# Altium PCB PCB1.PcbDoc (part 1 of 2)
Units mil, origin at the board's own origin, x right, y up, seen from the top; angles counter-clockwise.
Board outline 6000 x 4000 mil, 2 copper layers (Top Layer, Bottom Layer); 103 components, 58 nets, 299 pads, 28 vias.
Unrouted connection lines stored in the file: 129.
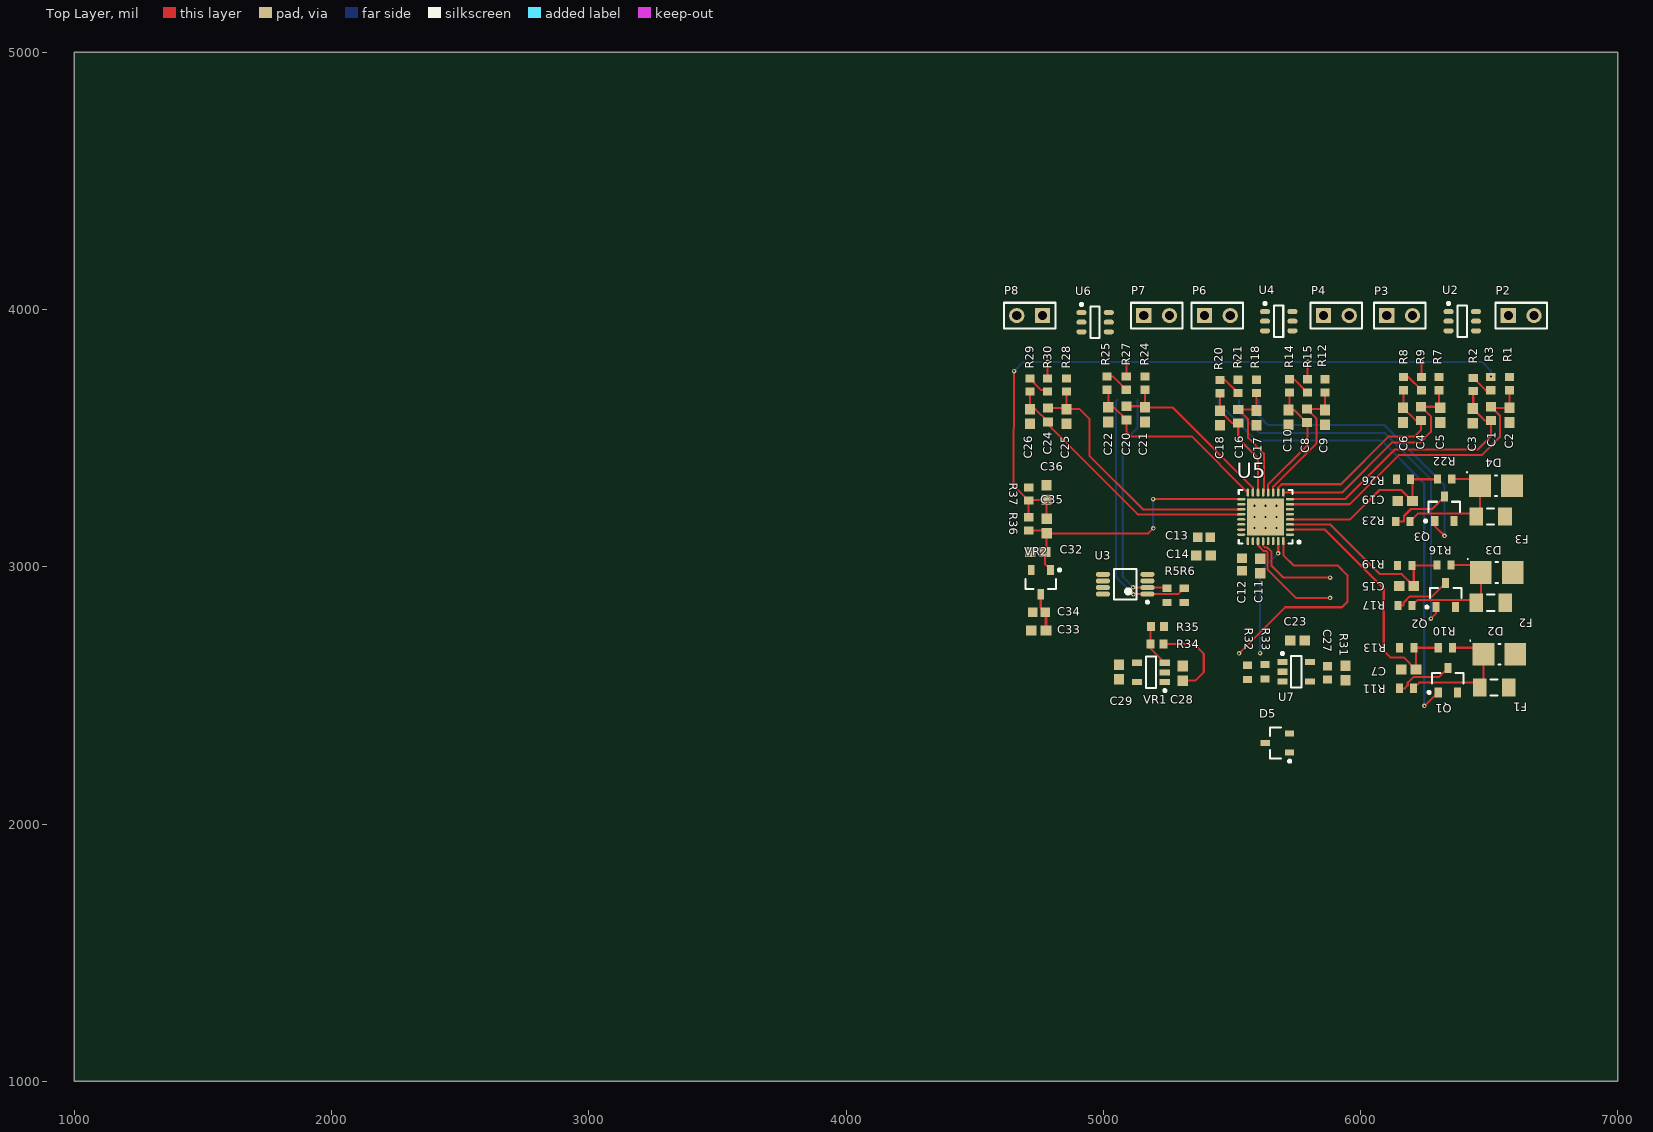
[diagram p0: Top Layer view]
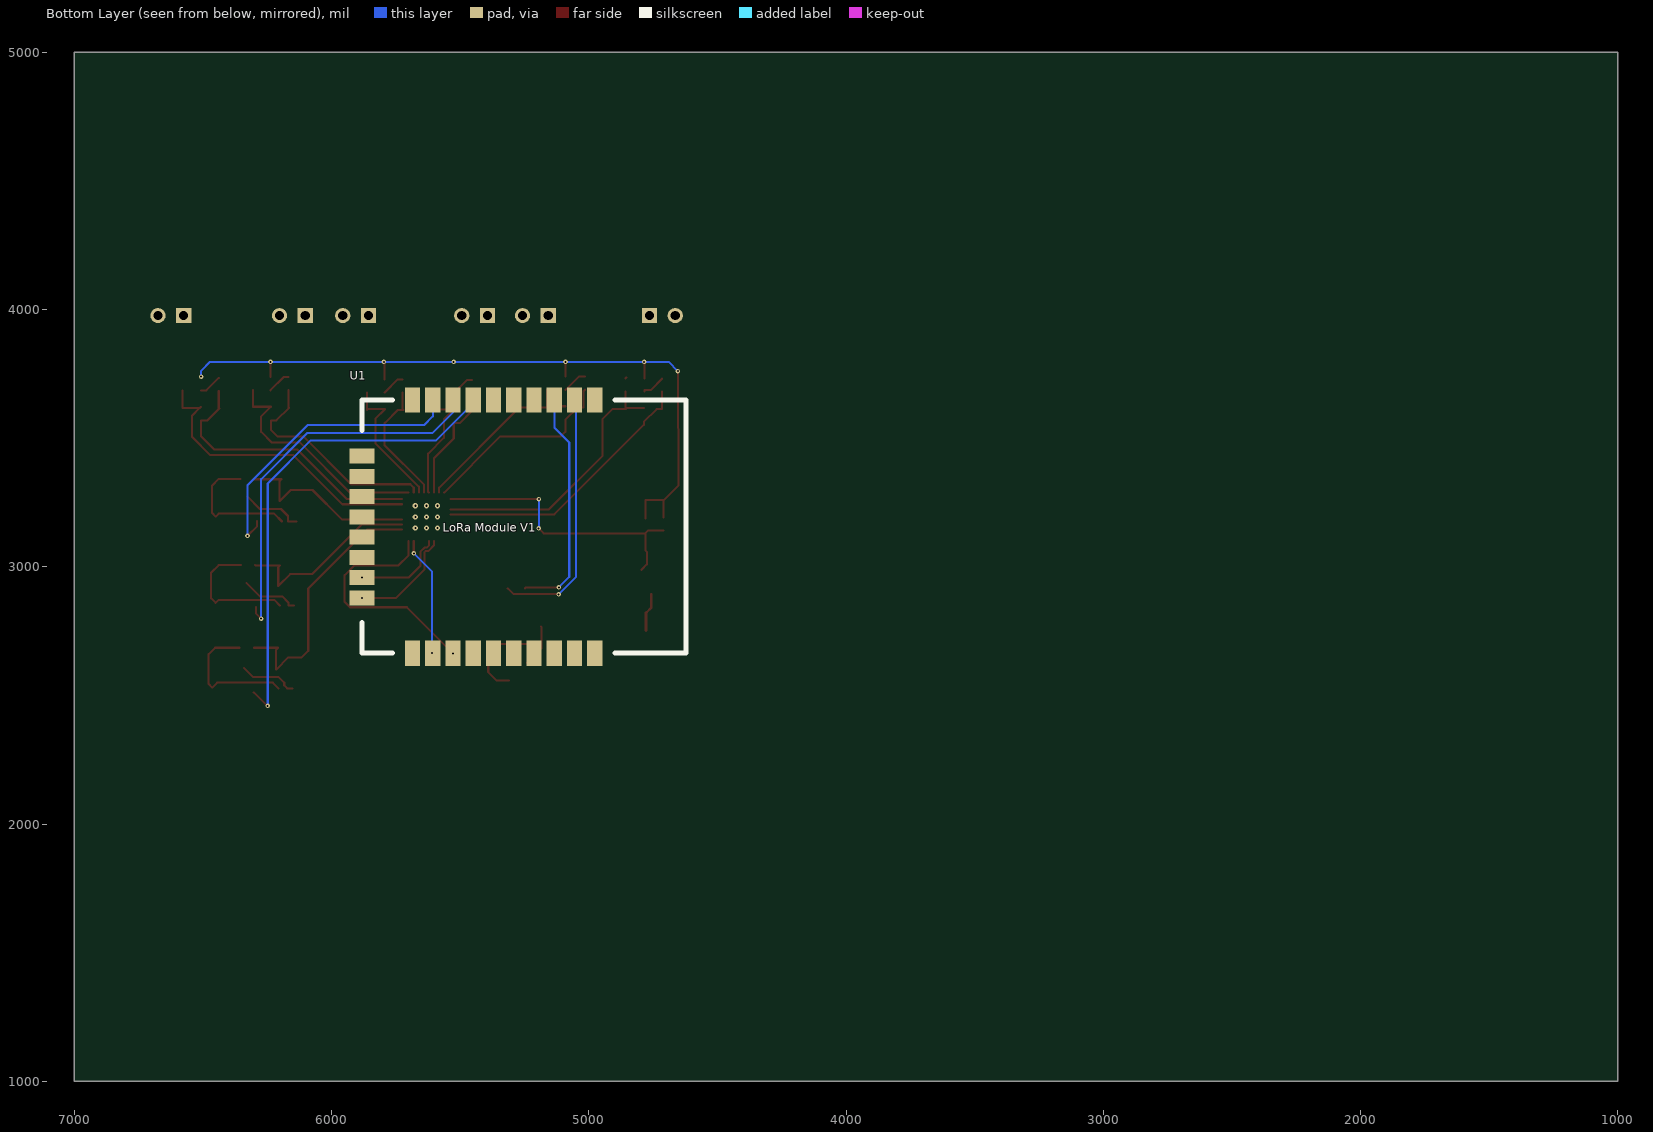
[diagram p1: Bottom Layer view, seen from below]

## Layer stack, top to bottom
Top Solder: solder mask 0.4, Solder Resist, Dk 3.5
Top Layer: signal copper 1.4
Dielectric 1: dielectric 12.6, FR-4, Dk 4.8
Bottom Layer: signal copper 1.4
Bottom Solder: solder mask 0.4, Solder Resist, Dk 3.5

## Board outline
1000,1000 7000,1000 7000,5000 1000,5000

## Design rules (kind name [scope] priority, off if disabled: settings)
Clearance [All] p1: gap=5 ignorepadtopadclearanceinfootprint=FALSE
HoleSize [All] p1: absolutevalues=TRUE maxlimit=248.03 minlimit=7.87 maxpercent=80.000 minpercent=20.000
MinimumSolderMaskSliver [All] p1: minsoldermaskwidth=7.87
PolygonConnect [All] p1: connectstyle=Relief reliefconductorwidth=10 reliefentries=4 polygonreliefangle="90 Angle" airgapwidth=10
RoomDefinition supply [InComponentClass('supply')] p1: confinementstyle=ConfineIn formatcopy=TRUE lockcomponents=FALSE outline 7045,4030 10955,4030 10955,4350 7045,4350
RoomDefinition Sheet1 [InComponentClass('Sheet1')] p2: confinementstyle=ConfineIn formatcopy=TRUE lockcomponents=FALSE outline 7045,2175 24230,2175 24230,3980 7045,3980
RoutingVias [All] p1: holewidth=7.87 width=50 viastyle="Through Hole" minholewidth=7.87 minwidth=23.62 maxholewidth=248.03 maxwidth=50
ShortCircuit [All] p1: allowed=TRUE
SolderMaskExpansion [All] p1: expansion=4
Width [All] p1: maxlimit=24 minlimit=3.5 preferedwidth=8
27 further rules are at their usual default settings.

## Classes and differential pairs
component class supply: C28 C29 C30 C31 C32 C33 C34 C35 C36 D5 L1 P9 R34 R35 R36 R37 VR1 VR2
component class Sheet1: C1 C2 C3 C4 C5 C6 C7 C8 C9 C10 C11 C12 C13 C14 C15 C16 C17 C18 C19 C20 C21 C22 C23 C24 C25 C26 C27 D1 D2 D3 D4 F1 F2 F3 P1 P2 P3 P4 P5 P6 P7 P8 Q1 Q2 Q3 R1 R2 R3 R4 R5 R6 R7 R8 R9 R10 R11 R12 R13 R14 R15 R16 R17 R18 R19 R20 R21 R22 R23 R24 R25 R26 R27 R28 R29 R30 R31 R32 R33 U1 U2 U3 U4 U5 U6 U7

## Components (designator, comment, footprint, x,y, rotation, side; value= is the part's Value field where it differs from the comment)
C1 "0.1uF" Chip2PinKEMETcap 6507.61,3595.3 r270 top
C2 "0.01 uF" Chip2PinWURTcap 6578.67,3589.4 r270 top
C3 "0.01 uF" Chip2PinWURTcap 6436.57,3586.64 r90 top
C4 "0.1uF" Chip2PinKEMETcap 6235.97,3595.47 r270 top
C5 "0.01 uF" Chip2PinWURTcap 6310.04,3589.57 r270 top
C6 "0.01 uF" Chip2PinWURTcap 6164.94,3589.57 r90 top
C7 "0.01uF 0603" Chip2PinWURTcap 6187.08,2600.2 r180 top
C8 "0.1uF" Chip2PinKEMETcap 5791.6,3586.89 r270 top
C9 "0.01 uF" Chip2PinWURTcap 5862.64,3580.98 r270 top
C10 "0.01 uF" Chip2PinWURTcap 5720.57,3580.98 r90 top
C11 "4.7uF" Chip2TAIYOcap 5539.44,3008.69 r90 top
C12 "0.01 uF" Chip2PinWURTcap 5610.47,3002.79 r270 top
C13 "4.7uF" Chip2TAIYOcap 5391.73,3114.57 r0 top
C14 "0.01 uF" Chip2PinWURTcap 5389.67,3043.53 r180 top
C15 "0.01uF 0603" Chip2PinWURTcap 6178.6,2925.2 r180 top
C16 "0.1uF" Chip2PinKEMETcap 5524.81,3585 r270 top
C17 "0.01 uF" Chip2PinWURTcap 5595.85,3579.09 r270 top
C18 "0.01 uF" Chip2PinWURTcap 5453.78,3578.03 r90 top
C19 "0.01uF 0603" Chip2PinWURTcap 6173.6,3255.2 r180 top
C20 "0.1uF" Chip2PinKEMETcap 5090.72,3597.35 r270 top
C21 "0.01 uF" Chip2PinWURTcap 5161.75,3591.45 r270 top
C22 "0.01 uF" Chip2PinWURTcap 5019.69,3591.45 r90 top
C23 "1uF" Chip2PinWURTcap 5754.92,2713.24 r0 top
C24 "0.1uF" Chip2PinKEMETcap 4785.67,3590 r270 top
C25 "0.01 uF" Chip2PinWURTcap 4856.7,3584.09 r270 top
C26 "0.01 uF" Chip2PinWURTcap 4714.64,3584.09 r90 top
C27 "NM" Chip2PinWURTcap 5941.63,2587.01 r270 top
C28 "1uF" Chip2PinWURTcap 5309.34,2585.71 r90 top
C29 "1uF" Chip2PinWURTcap 5060.97,2590.71 r90 top
C30 "0.01 uF" Chip2PinWURTcap 9365,4180 r90 top
C31 "0.01 uF" Chip2PinWURTcap 9595,4180 r90 top
C32 "1uF" Chip2PinWURTcap 4745.28,3057.81 r0 top
C33 "0.01 uF" Chip2PinWURTcap 4748.82,2752.19 r0 top
C34 "4.7uF" Chip2TAIYOcap 4750,2823.22 r0 top
C35 "1uF" Chip2PinWURTcap 4780.28,3158.37 r270 top
C36 "1uF" Chip2PinWURTcap 4779.34,3288.45 r270 top
D1 "Red LEDs" Wurth_LED_0603 20835,3840 r0 top
D2 "10v" Chip2Pin-SMB10JA 6539.8,2660.2 r180 top
D3 "10v" Chip2Pin-SMB10JA 6529.8,2977.57 r180 top
D4 "10v" Chip2Pin-SMB10JA 6526.81,3315.2 r180 top
D5 "5v" SOT23-BZX84B5V 5677.17,2314.96 r180 top
F1 "50mA 60V 1206" Chip2Pin-1206-FUSE-0ZCJ0005FF2E 6519.8,2530.2 r180 top
F2 "50mA 60V 1206" Chip2Pin-1206-FUSE-0ZCJ0005FF2E 6506.69,2860.2 r180 top
F3 "50mA 60V 1206" Chip2Pin-1206-FUSE-0ZCJ0005FF2E 6505.91,3195.2 r180 top
L1 "120 ohm, 100MHz" Chip22506031217Z0-FeBread 10510,4210 r0 top
P1 "" HDR1X2 24170,3720 r90 top
P2 "" HDR1X2 6574.8,3976.38 r0 top
P3 "" HDR1X2 6102.36,3976.38 r0 top
P4 "" HDR1X2 5856.27,3976.38 r0 top
P5 "" HDR1X9 17815,3020 r90 top
P6 "" HDR1X2 5393.7,3976.38 r0 top
P7 "" HDR1X2 5157.48,3976.38 r0 top
P8 "" HDR1X2 4763.78,3976.38 r180 top
P9 "" HDR1X2 10665,4090 r90 top
Q1 "FDV305N" SOT23-3PIN-ON-STANT 6339.8,2558.89 r90 top
Q2 "FDV305N" SOT23-3PIN-ON-STANT 6331.32,2890.2 r90 top
Q3 "FDV305N" SOT23-3PIN-ON-STANT 6326.32,3225.2 r90 top
R1 "1K" Chip2VISHAYres_0603 6578.74,3711.61 r90 top
R2 "1K" Chip2VISHAYres_0603 6438.54,3708.86 r90 top
R3 "10K" Chip2Pin-ROHM-res 6506.57,3711.61 r90 top
R4 "470 Ohms" ChipYAGEO_0603 23350,3845 r0 top
R5 "10K 0603 1%" ChipYAGEO_0603 5247.86,2888.95 r270 top
R6 "10K 0603 1%" ChipYAGEO_0603 5314.96,2888.78 r270 top
R7 "1K" Chip2VISHAYres_0603 6305.04,3711.78 r90 top
R8 "1K" Chip2VISHAYres_0603 6167.87,3711.78 r90 top
R9 "10K" Chip2Pin-ROHM-res 6237.94,3711.78 r90 top
R10 "7.5K" ChipYAGEO_0603 6329.8,2685.2 r0 top
R11 "523ohm 0603 1%" ChipYAGEO_0603 6179.13,2527.56 r0 top
R12 "1K" Chip2VISHAYres_0603 5862.64,3703.2 r90 top
R13 "2.49K" ChipYAGEO_0603 6179.8,2685.2 r0 top
R14 "1K" Chip2VISHAYres_0603 5723.5,3703.2 r90 top
R15 "10K" Chip2Pin-ROHM-res 5793.57,3703.2 r90 top
R16 "7.5K" ChipYAGEO_0603 6324.8,3006.51 r0 top
R17 "523ohm 0603 1%" ChipYAGEO_0603 6173.23,2849.41 r0 top
R18 "1K" Chip2VISHAYres_0603 5595.85,3701.31 r90 top
R19 "2.49K" ChipYAGEO_0603 6172.24,3005.2 r0 top
R20 "1K" Chip2VISHAYres_0603 5453.78,3700.25 r90 top
R21 "10K" Chip2Pin-ROHM-res 5523.78,3701.31 r90 top
R22 "7.5K" ChipYAGEO_0603 6327.24,3341.51 r0 top
R23 "523ohm 0603 1%" ChipYAGEO_0603 6164.8,3176.13 r0 top
R24 "1K" Chip2VISHAYres_0603 5161.75,3713.66 r90 top
R25 "1K" Chip2VISHAYres_0603 5014.69,3713.66 r90 top
R26 "2.49K" ChipYAGEO_0603 6167.36,3340.2 r0 top
R27 "10K" Chip2Pin-ROHM-res 5089.69,3713.66 r90 top
R28 "1K" Chip2VISHAYres_0603 4857.74,3706.31 r90 top
R29 "1K" Chip2VISHAYres_0603 4714.64,3706.31 r90 top
R30 "10K" Chip2Pin-ROHM-res 4783.7,3706.31 r90 top
R31 "0 ohm" Chip2VISHAYres_0603 5872.57,2587.6 r90 top
R32 "1M" ChipYAGEO_0603 5561.04,2589.57 r270 top
R33 "1M" ChipYAGEO_0603 5628.14,2592.01 r270 top
R34 "0 ohm" Chip2VISHAYres_0603 5208.66,2699.97 r0 top
R35 "0 ohm" Chip2VISHAYres_0603 5210.63,2767.07 r180 top
R36 "1K" Chip2VISHAYres_0603 4710.28,3166.91 r90 top
R37 "1K" Chip2VISHAYres_0603 4710.28,3282.5 r90 top
U1 "loRa node v1" LoRa_node 5881.89,2664.37 r270 bottom
U2 "IP4220CZ6F" TSOP6-IP4220CZ6F 6395.67,3954.72 r0 top
U3 "MCP9808T" SOP127P600-8N-MCP9808T 5085.3,2932.09 r180 top
U4 "IP4220CZ6F" TSOP6-IP4220CZ6F 5682.09,3954.72 r0 top
U5 "AD71994" QFN127P600-AD7194BCPZ 5631.18,3193.9 r180 top
U6 "IP4220CZ6F" TSOP6-IP4220CZ6F 4968.5,3950.79 r0 top
U7 "MCP6001T-I/OT" SOT23-MCP600 5750.35,2592.01 r0 top
VR1 "TLV755P" SOT23-TLV755P 5185.16,2589.57 r180 top
VR2 "AD1582BRTZ" SOT23-AD1582BRTZ 4757.68,2940.51 r270 top

## Footprints (in the part's own frame and the unit in brackets; to place one, negate y for a bottom-side part, rotate by r counter-clockwise, add the part's x,y. Pads: shape width x height; smd on the part's side, far side on the other; paste and mask are expansions set on the pad)
Chip2Pin-1206-FUSE-0ZCJ0005FF2E [mm]
  rect 1.35x1.8 smd: 1(-1.425,0) 2(1.425,0)
  silkscreen extent -0.35,-0.8 0.35,0.8, body extent -1.75,-0.9 1.75,0.9, height 0.85
Chip2Pin-ROHM-res [mm]
  rect 0.8x0.9 smd: 1(-0.65,0) 2(0.65,0)
  body extent -0.85,-0.45 0.85,0.45, height 0.55
Chip2Pin-SMB10JA [mm]
  rect 2.15x2.25 smd: 1(-1.575,0) 2(1.575,0)
  silkscreen extent -0.1,-1.39 2.91,1.02, body extent -2.28,-1.1 2.28,1.1, height 2.5
Chip2PinKEMETcap [mm]
  rect 0.9x1 smd: 1(-0.675,0) 2(0.675,0)
  body extent -0.87,-0.48 0.87,0.48, height 0.55
Chip2PinWURTcap [mm]
  rect 1.05x1 smd: 1(-0.725,0) 2(0.725,0)
  body extent -0.87,-0.48 0.87,0.48, height 0.55
Chip2TAIYOcap [mm]
  rect 0.95x0.95 smd: 1(-0.625,0) 2(0.625,0)
  body extent -0.85,-0.45 0.85,0.45, height 0.55
Chip2VISHAYres_0603 [mm]
  rect 0.8x0.9 smd: 1(-0.65,0) 2(0.65,0)
  body extent -0.85,-0.45 0.85,0.45, height 0.6
Chip22506031217Z0-FeBread [mm]
  rect 0.87x0.98 smd: 1(-0.665,0) 2(0.665,0)
  body extent -0.87,-0.48 0.87,0.48, height 0.95
ChipYAGEO_0603 [mm]
  rect 0.7x0.9 smd: 1(-0.7,0) 2(0.7,0)
  body extent -0.85,-0.45 0.85,0.45, height 0.55
HDR1X2 [mm] "Connector; Header; 2 Position"
  rect 1.5x1.5 hole 0.9: 1(0,0)
  round 1.5 hole 0.9: 2(2.54,0)
  silkscreen extent -1.27,-1.27 3.81,1.27
HDR1X9 [mm] "Connector; Header; 9 Position"
  rect 1.5x1.5 hole 0.9: 1(0,0)
  round 1.5 hole 0.9: 2(2.54,0) 3(5.08,0) 4(7.62,0) 5(10.16,0) 6(12.7,0) 7(15.24,0) 8(17.78,0) 9(20.32,0)
  silkscreen extent -1.27,-1.27 21.59,1.27
LoRa_node [mm]
  rect 2.5x1.5 smd: 1(-25,23) 2(-25,21) 3(-25,19) 4(-25,17) 5(-25,15) 6(-25,13) 7(-25,11) 8(-25,9) 9(-25,7) 10(-25,5) 19(0,5) 20(0,7) 21(0,9) 22(0,11) 23(0,13) 24(0,15) 25(0,17) 26(0,19) 27(0,21) 28(0,23)
  rect 1.5x2.5 smd: 11(-19.45,0) 12(-17.45,0) 13(-15.45,0) 14(-13.45,0) 15(-11.45,0) 16(-9.45,0) 17(-7.45,0) 18(-5.45,0)
  silkscreen extent -25,0 0,32, body extent -25,0 0,32, height 2.45
QFN127P600-AD7194BCPZ [mm]
  oval 0.8x0.25 smd: 1(-2.4,1.75) 2(-2.4,1.25) 3(-2.4,0.75) 4(-2.4,0.25) 5(-2.4,-0.25) 6(-2.4,-0.75) 7(-2.4,-1.25) 8(-2.4,-1.75) 17(2.4,-1.75) 18(2.4,-1.25) 19(2.4,-0.75) 20(2.4,-0.25) 21(2.4,0.25) 22(2.4,0.75) 23(2.4,1.25) 24(2.4,1.75)
  oval 0.25x0.8 smd: 9(-1.75,-2.4) 10(-1.25,-2.4) 11(-0.75,-2.4) 12(-0.25,-2.4) 13(0.25,-2.4) 14(0.75,-2.4) 15(1.25,-2.4) 16(1.75,-2.4) 25(1.75,2.4) 26(1.25,2.4) 27(0.75,2.4) 28(0.25,2.4) 29(-0.25,2.4) 30(-0.75,2.4) 31(-1.25,2.4) 32(-1.75,2.4)
  rect 3.65x3.65 smd: 33(0,0)
  silkscreen extent -3.43,-2.65 2.65,2.65, body extent -2.52,-2.52 2.52,2.52, height 0.8
SOP127P600-8N-MCP9808T [mm]
  oval 1.4x0.5 smd: 1(-2.2,0.975) 2(-2.2,0.325) 3(-2.2,-0.325) 4(-2.2,-0.975) 5(2.2,-0.975) 6(2.2,-0.325) 7(2.2,0.325) 8(2.2,0.975)
  silkscreen extent -2.33,-1.5 1.1,1.9, body extent -2.45,-1.5 2.45,1.5, height 1.1
SOT23-3PIN-ON-STANT [mm]
  rect 1x0.7 smd: 1(-1.2,0.95) 2(-1.2,-0.95) 3(1.2,0)
  silkscreen extent -1.32,-1.55 0.7,1.97, body extent -1.35,-1.55 1.35,1.55, height 1.2
SOT23-AD1582BRTZ [mm]
  rect 1x0.65 smd: 1(-1.2,0.95) 2(-1.2,-0.95) 3(1.2,0)
  silkscreen extent -1.32,-1.5 0.7,1.95, body extent -1.32,-1.52 1.32,1.52, height 1.12
SOT23-BZX84B5V [mm]
  rect 0.9x0.6 smd: 1(-1.2,0.95) 2(-1.2,-0.95) 3(1.2,0)
  silkscreen extent -1.33,-1.55 0.75,1.92, body extent -1.3,-1.55 1.3,1.55, height 1.15
SOT23-MCP600 [mm]
  rect 1x0.6 smd: 1(-1.375,0.95) 2(-1.375,0) 3(-1.375,-0.95) 4(1.375,-0.95) 5(1.375,0.95)
  silkscreen extent -1.5,-1.55 0.5,1.92, body extent -1.5,-1.55 1.5,1.55, height 1.45
SOT23-TLV755P [mm]
  rect 1x0.6 smd: 1(-1.375,0.95) 2(-1.375,0) 3(-1.375,-0.95) 4(1.375,-0.95) 5(1.375,0.95)
  silkscreen extent -1.5,-1.55 0.5,1.92, body extent -1.5,-1.53 1.5,1.53, height 1.45
TSOP6-IP4220CZ6F [mm] "TSOP, 6-Leads, Body 2.90x1.50mm, Pitch 0.95mm, IPC Medium Density"
  oval 1x0.5 smd: 1(-1.35,0.95) 2(-1.35,0) 3(-1.35,-0.95) 4(1.35,-0.95) 5(1.35,0) 6(1.35,0.95)
  silkscreen extent -1.47,-1.55 0.45,1.87, body extent -1.38,-1.55 1.38,1.55, height 1.1
Wurth_LED_0603 [mm]
  rect 0.8x0.8 smd: 1(-0.8,0) 2(0.8,0)
  silkscreen extent -1.65,-0.76 1.83,0.76, body extent -0.9,-0.38 0.75,0.35, height 0.68

## Part data
C1 C4 C8 C16 C20 C24: library part C0603C104J3RAC, "Multilayer Ceramic Capacitors MLCC - SMD/SMT 25V 0.1uF 0603 X7R 0.05", Capacitance="0.1 uF", Capacitance - nF="100 nF", Capacitance - pF="100000 pF", Case Code - in=0603, Case Code - mm=1608, Dielectric=X7R, Manufacturer=KEMET, Maximum Operating Temperature="+ 125 C", Minimum Operating Temperature="- 55 C", Package / Case="0603 (1608 metric)", Supplier Part Number 1=80-C0603C104J3RAC, Tolerance="5 %", Voltage Rating AC=-, Voltage Rating DC="25 VDC", Brand=KEMET, Category="Multilayer Ceramic Capacitors MLCC - SMD/SMT", Class="Class 2", CNHTS=8532241000, ComponentLink1Description=http://www.mouser.com/datasheet/2/212/KEM_C1002_X7R_SMD-1102033.pdf, ComponentLink1URL=http://www.mouser.com/datasheet/2/212/KEM_C1002_X7R_SMD-1102033.pdf, Height="0.8 mm", HTS Code=8532240020, LatestRevisionDate=17-Jul-2002, LatestRevisionNote="Re-released for DXP Platform.", Length="1.6 mm", Manufacturer Part Number=C0603C104J3RAC, Minimum Order Quantity=1, PackageDescription="Radial Cap, Thru-Hole; 2 Leads; 0.3 in Pin Spacing", PackageReference=RAD-0.3, Packaging="Cut Tape", Pricing 1="1=0.367, 10=0.213, 100=0.129, 500=0.117, 1000=0.106, 4000=0.079, 8000=0.072, 24000=0.069, 48000=0.061 (EUR)", Product="General Type MLCCs", Product Type="Ceramic Capacitors", Published=8-Jun-2000, Publisher="Altium Limited", Reeling=True, RoHS="RoHS Compliant", RoHS - Mouser=Y, Series="SMD Comm X7R", Standard Pack Qty=4000, Stock 1=3422, Subcategory=Capacitors, Supplier 1=Mouser, TARIC=8532240000, Termination=Standard, Termination Style=SMD/SMT, Width="0.8 mm"
C2 C3 C5 C6 C9 C10 C12 C14 C17 C18 C21 C22 C25 C26 C30 C31 C33: library part 885012206089, "Multilayer Ceramic Capacitors MLCC - SMD/SMT WCAP-CSGP 0.01uF 0603 10% 50V MLCC", Capacitance - nF="10 nF", Capacitance - pF="10000 pF", Case Code - in=0603, Case Code - mm=1608, Dielectric=X7R, Manufacturer="Wurth Electronics", Maximum Operating Temperature="+ 125 C", Minimum Operating Temperature="- 55 C", Package / Case="0603 (1608 metric)", Supplier Part Number 1=710-885012206089, Tolerance="10 %", Voltage Rating DC="50 VDC", Brand="Wurth Electronics", Capacitance="0.01 uF", Category="Multilayer Ceramic Capacitors MLCC - SMD/SMT", ComponentLink1Description=https://www.mouser.com/datasheet/2/445/885012206089-554597.pdf, ComponentLink1URL=https://www.mouser.com/datasheet/2/445/885012206089-554597.pdf, Height="0.8 mm", Length="1.6 mm", Manufacturer Part Number=885012206089, Minimum Order Quantity=1, Packaging="Cut Tape", Pricing 1="1=0.040, 10=0.032, 50=0.026, 100=0.021, 250=0.018, 500=0.017, 4000=0.017 (EUR)", Product="General Type MLCCs", Product Type="Ceramic Capacitors", Reeling=True, RoHS="RoHS Compliant", RoHS - Mouser=Y, Series=WCAP-CSGP, Standard Pack Qty=4000, Stock 1=174725, Subcategory=Capacitors, Supplier 1=Mouser, Termination Style=SMD/SMT, Width="0.8 mm"
C7 C15 C19: library part 885012206089, "Multilayer Ceramic Capacitors MLCC - SMD/SMT WCAP-CSGP 0.01uF 0603 10% 50V MLCC", Capacitance="0.01 uF", Capacitance - nF="10 nF", Capacitance - pF="10000 pF", Case Code - in=0603, Case Code - mm=1608, Dielectric=X7R, Manufacturer="Wurth Electronics", Maximum Operating Temperature="+ 125 C", Minimum Operating Temperature="- 55 C", Package / Case="0603 (1608 metric)", Supplier Part Number 1=710-885012206089, Tolerance="10 %", Voltage Rating DC="50 VDC", Brand="Wurth Electronics", Category="Multilayer Ceramic Capacitors MLCC - SMD/SMT", ComponentLink1Description=https://www.mouser.com/datasheet/2/445/885012206089-554597.pdf, ComponentLink1URL=https://www.mouser.com/datasheet/2/445/885012206089-554597.pdf, Height="0.8 mm", Length="1.6 mm", Manufacturer Part Number=885012206089, Minimum Order Quantity=1, Packaging="Cut Tape", Pricing 1="1=0.040, 10=0.032, 50=0.026, 100=0.021, 250=0.018, 500=0.017, 4000=0.017 (EUR)", Product="General Type MLCCs", Product Type="Ceramic Capacitors", Reeling=True, RoHS="RoHS Compliant", RoHS - Mouser=Y, Series=WCAP-CSGP, Standard Pack Qty=4000, Stock 1=174725, Subcategory=Capacitors, Supplier 1=Mouser, Termination Style=SMD/SMT, Width="0.8 mm"
C11 C13 C34: library part JMK107BJ475KA-T, "Multilayer Ceramic Capacitors MLCC - SMD/SMT 4.7uF 6.3V X5R 0603+/-10% Gen Purp", Capacitance="4.7 uF", Capacitance - nF="4700 nF", Case Code - in=0603, Case Code - mm=1608, Dielectric=X5R, Manufacturer="Taiyo Yuden", Maximum Operating Temperature="+ 85 C", Minimum Operating Temperature="- 55 C", Package / Case="0603 (1608 metric)", Supplier Part Number 1=963-JMK107BJ475KA-T, Tolerance="10 %", Voltage Rating DC="6.3 VDC", Brand="Taiyo Yuden", Category="Multilayer Ceramic Capacitors MLCC - SMD/SMT", Class="Class 2", ComponentLink1Description=https://www.mouser.com/datasheet/2/396/mlcc02_e-1307760.pdf, ComponentLink1URL=https://www.mouser.com/datasheet/2/396/mlcc02_e-1307760.pdf, Height="0.8 mm", Length="1.6 mm", Manufacturer Part Number=JMK107BJ475KA-T, Minimum Order Quantity=1, Packaging="Cut Tape", Pricing 1="1=0.114, 10=0.042, 100=0.029, 500=0.024, 1000=0.019, 4000=0.019, 8000=0.014, 12000=0.012 (EUR)", Product="General Type MLCCs", Product Type="Ceramic Capacitors", Reeling=True, RoHS="RoHS Compliant", RoHS - Mouser=Y, Series=M, Standard Pack Qty=4000, Stock 1=0, Subcategory=Capacitors, Supplier 1=Mouser, Termination=Standard, Termination Style=SMD/SMT, Type="General Purpose", Width="0.8 mm"
C23 C28 C29 C32 C35 C36: library part 885012206052, "Ceramic Capacitors", Capacitance="1 uF", Capacitance - nF="1000 nF", Case Code - in=0603, Case Code - mm=1608, Dielectric=X7R, Manufacturer="Wurth Electronics", Maximum Operating Temperature="+ 125 C", Minimum Operating Temperature="- 55 C", Package / Case="0603 (1608 metric)", Supplier Part Number 1=710-885012206052, Tolerance="10 %", Voltage Rating DC="16 VDC", Brand="Wurth Electronics", Category="Multilayer Ceramic Capacitors MLCC - SMD/SMT", CNHTS=8532241000, ComponentLink1Description=http://www.mouser.com/datasheet/2/445/885012206052-554330.pdf, ComponentLink1URL=http://www.mouser.com/datasheet/2/445/885012206052-554330.pdf, Height="0.8 mm", HTS Code=8532240020, LatestRevisionDate=17-Jul-2002, LatestRevisionNote="Re-released for DXP Platform.", Length="1.6 mm", Manufacturer Part Number=885012206052, Minimum Order Quantity=1, PackageDescription="Radial Cap, Thru-Hole; 2 Leads; 0.3 in Pin Spacing", PackageReference=RAD-0.3, Packaging="Cut Tape", Pricing 1="1=0.110, 10=0.104, 50=0.085, 100=0.067, 250=0.059, 500=0.054, 4000=0.054 (EUR)", Product="General Type MLCCs", Product Type="Ceramic Capacitors", Published=8-Jun-2000, Publisher="Altium Limited", Reeling=True, RoHS="RoHS Compliant", RoHS - Mouser=Y, Series=WCAP-CSGP, Standard Pack Qty=4000, Stock 1=27157, Subcategory=Capacitors, Supplier 1=Mouser, TARIC=8532240000, Termination Style=SMD/SMT, Width="0.8 mm"
C27: library part 0603_CAP
D1: library part 150060RS75000, "Typical INFRARED GaAs LED", If - Forward Current="20 mA", Illumination Color=Red, Lens Color/Style="Water Clear", Manufacturer="Wurth Electronics", Maximum Operating Temperature="+ 85 C", Minimum Operating Temperature="- 40 C", Package / Case="0603 (1608 metric)", Power Rating="72 mW", Supplier Part Number 1=710-150060RS75000, Vf - Forward Voltage="2 V", Vr - Reverse Voltage="5 V", Wavelength/Color Temperature="625 nm", Brand="Wurth Electronics", Category="Standard LEDs - SMD", CNHTS=8541401000, ComponentLink1Description=http://www.mouser.com/datasheet/2/445/150060RS75000-368563.pdf, ComponentLink1URL=http://www.mouser.com/datasheet/2/445/150060RS75000-368563.pdf, Height="0.7 mm", HTS Code=8541402000, LatestRevisionDate=08-Jul-2005, LatestRevisionNote="Mech Layer 1 removed.", Length="1.6 mm", Lens Dimensions="1.1 mm x 0.8 mm", Lens Shape=Rectangular, Luminous Intensity="250 mcd", Manufacturer Part Number=150060RS75000, Minimum Order Quantity=1, Mounting Style=SMD/SMT, MXHTS=85414001, PackageDescription="LED; 2 Leads", PackageReference=LED-0, Packaging="Cut Tape", Peak Wavelength="630 nm", Pricing 1="1=0.130, 10=0.126, 50=0.115, 100=0.099, 500=0.085, 4000=0.085 (EUR)", Product="Red LEDs", Product Type="LED - Standard", Published=8-Jun-2000, Publisher="Altium Limited", Reeling=True, RoHS="RoHS Compliant", RoHS - Mouser=Y, Series=WL-SMCW, Standard Pack Qty=4000, Stock 1=74254, Subcategory=LEDs, Supplier 1=Mouser, TARIC=8541401000, Viewing Angle="140 deg", Width="0.8 mm"
D2 D3 D4: library part SMBJ10A-13-F, "ESD Suppressors / TVS Diodes 600W 10.0V", Breakdown Voltage="12.8 V", Clamping Voltage="17 V", Manufacturer="Diodes Incorporated", Maximum Operating Temperature="+ 150 C", Minimum Operating Temperature="- 55 C", Package / Case="DO-214AA-2 (SMB)", Pd - Power Dissipation="600 W", Supplier Part Number 1=621-SMBJ10A-13-F, Vesd - Voltage ESD Air Gap=-, Working Voltage="10 V", Brand="Diodes Incorporated", Category="ESD Suppressors / TVS Diodes", ComponentLink1Description=https://www.mouser.com/datasheet/2/115/ds19002-1078141.pdf, ComponentLink1URL=https://www.mouser.com/datasheet/2/115/ds19002-1078141.pdf, Manufacturer Part Number=SMBJ10A-13-F, Minimum Order Quantity=1, Packaging="Cut Tape", Polarity=Unidirectional, Pricing 1="1=0.358, 10=0.248, 100=0.114, 1000=0.087, 3000=0.075, 9000=0.068, 24000=0.064 (EUR)", Product Type="TVS Diodes", Reeling=True, RoHS="RoHS Compliant", RoHS - Mouser=Y, Series=SMBJ, Standard Pack Qty=3000, Stock 1=4423, Subcategory="TVS Diodes / ESD Suppression Diodes", Supplier 1=Mouser, Termination Style=SMD/SMT, Vesd - Voltage ESD Contact=-
D5: library part BZX84B5V1LFHT116, "Zener Diodes 5-5.2V 5mA SOT-23; SOT-23", Ir - Reverse Current="2 uA", Manufacturer="ROHM Semiconductor", Maximum Operating Temperature="+ 150 C", Minimum Operating Temperature="- 65 C", Package / Case=SOT-23-3, Pd - Power Dissipation="250 mW", Supplier Part Number 1=755-BZX84B5V1LFHT116, Voltage Temperature Coefficient="2.6 mV/C", Vz - Zener Voltage="5 V", Zener Current="5 mA", Brand="ROHM Semiconductor", Category="Zener Diodes", ComponentLink1Description=https://www.mouser.com/datasheet/2/348/bzx84b5v1lfht116-e-1507876.pdf, ComponentLink1URL=https://www.mouser.com/datasheet/2/348/bzx84b5v1lfht116-e-1507876.pdf, Configuration=Single, Height="0.95 mm", Length="2.9 mm", Manufacturer Part Number=BZX84B5V1LFHT116, Minimum Order Quantity=1, Mounting Style=SMD/SMT, Packaging="Cut Tape", Pricing 1="1=0.192, 10=0.133, 100=0.055, 1000=0.038, 3000=0.030 (EUR)", Product Status="New Product", Product Type="Zener Diodes", Reeling=True, RoHS="RoHS Compliant", RoHS - Mouser=Y, Standard Pack Qty=3000, Stock 1=5913, Subcategory="Diodes & Rectifiers", Supplier 1=Mouser, Width="1.3 mm", Zz - Zener Impedance="60 Ohms"
F1 F2 F3: library part 0ZCJ0005FF2E, "Resettable Fuses - PPTC Fuse", Current Rating - Max="10 A", Hold Current="50 mA", Manufacturer="Bel Fuse", Maximum Operating Temperature="+ 85 C", Maximum Voltage="60 VDC", Minimum Operating Temperature="- 40 C", Package / Case="1206 (3216 metric)", Pd - Power Dissipation="400 mW", Resistance="50 Ohms", Supplier Part Number 1=530-0ZCJ0005FF2E, Trip Current="150 mA", Brand="Bel Fuse", Category="Resettable Fuses - PPTC", ComponentLink1Description=https://www.mouser.com/datasheet/2/643/0ZCJ_Nov2016-1132002.pdf, ComponentLink1URL=https://www.mouser.com/datasheet/2/643/0ZCJ_Nov2016-1132002.pdf, Manufacturer Part Number=0ZCJ0005FF2E, Minimum Order Quantity=1, Mounting Style=SMD/SMT, Packaging="Cut Tape", Pricing 1="1=0.096, 10=0.085, 100=0.060, 250=0.059, 500=0.050, 1000=0.044, 3000=0.041, 6000=0.038, 9000=0.036 (EUR)", Product Type="Resettable Fuses - PPTC", Reeling=True, RoHS="RoHS Compliant", RoHS - Mouser=Y, Series=ZCJ, Standard Pack Qty=3000, Stock 1=83395, Subcategory="PPTC Resettable Fuses", Supplier 1=Mouser, Termination Style=SMD/SMT, Type="PTC Resettable Fuses"
L1: library part 2506031217Z0, "Ferrite Beads MULTILAYER CHIP BEAD Z=120 OHM@100MHz 25%", Capacitance=-, Manufacturer=Fair-Rite, Maximum DC Current="450 mA", Maximum DC Resistance="300 mOhms", Maximum Operating Temperature="+ 125 C", Minimum Operating Temperature="- 55 C", Operating Temperature Range="- 55 C to + 125 C", Package / Case="0603 (1608 metric)", Supplier Part Number 1=623-2506031217Z0, Test Frequency="100 MHz", Tolerance="25 %", Brand=Fair-Rite, Category="Ferrite Beads", ComponentLink1Description=https://www.mouser.com/datasheet/2/150/2506031217Z0-471794.pdf, ComponentLink1URL=https://www.mouser.com/datasheet/2/150/2506031217Z0-471794.pdf, Height="0.8 mm", Impedance="120 Ohms", Length="1.6 mm", Manufacturer Part Number=2506031217Z0, Minimum Order Quantity=1, Packaging="Cut Tape", Pricing 1="1=0.032, 2500=0.027, 4000=0.025, 8000=0.024, 24000=0.022, 48000=0.021, 100000=0.018, 400000=0.016 (EUR)", Product="Ferrite Chip Beads", Product Type="Ferrite Beads", Reeling=True, RoHS="RoHS Compliant", RoHS - Mouser=Y, Standard Pack Qty=4000, Stock 1=9619, Subcategory=Ferrites, Supplier 1=Mouser, Termination=-, Termination Style=SMD/SMT, Type="Multilayer Ferrite Chip Bead", Width="0.8 mm"
P1 P2 P3 P4 P6 P7 P8 P9: library part "Header 2", "Header, 2-Pin", LatestRevisionDate=17-Jul-2002, LatestRevisionNote="Re-released for DXP Platform.", Publisher="Altium Limited"
P5: library part "Header 9", "Header, 9-Pin", LatestRevisionDate=17-Jul-2002, LatestRevisionNote="Re-released for DXP Platform.", Publisher="Altium Limited"
Q1 Q2 Q3: "MOSFET 20V N-Channel PowerTrench", Id - Continuous Drain Current="900 mA", Manufacturer="ON Semiconductor / Fairchild", Maximum Operating Temperature="+ 150 C", Minimum Operating Temperature="- 55 C", Package / Case=SOT-23-3, Pd - Power Dissipation="350 mW", Rds On - Drain-Source Resistance="164 mOhms", Supplier Part Number 1=512-FDV305N, Vds - Drain-Source Breakdown Voltage="20 V", Vgs - Gate-Source Voltage="12 V", Brand="ON Semiconductor / Fairchild", Category=MOSFET, Channel Mode=Enhancement, ComponentLink1Description=https://www.mouser.com/datasheet/2/308/FDV305N-1300591.pdf, ComponentLink1URL=https://www.mouser.com/datasheet/2/308/FDV305N-1300591.pdf, Configuration=Single, Fall Time="7 ns", Forward Transconductance - Min="3 S", Height="1.2 mm", Length="2.9 mm", Manufacturer Part Number=FDV305N, Minimum Order Quantity=1, Mounting Style=SMD/SMT, Number of Channels="1 Channel", Packaging="Cut Tape", Pricing 1="1=0.410, 10=0.293, 100=0.134, 1000=0.103, 3000=0.088, 9000=0.080, 24000=0.075, 45000=0.068 (EUR)", Product="MOSFET Small Signal", Product Type=MOSFET, Reeling=True, Rise Time="7 ns", RoHS="RoHS Compliant", RoHS - Mouser=Y, Series=FDV305N, Standard Pack Qty=3000, Stock 1=26056, Subcategory=MOSFETs, Supplier 1=Mouser, Technology=Si, Tradename=PowerTrench, Transistor Polarity=N-Channel, Transistor Type="1 N-Channel", Type=MOSFET, Typical Turn-Off Delay Time="8 ns", Typical Turn-On Delay Time="4.5 ns", Width="1.3 mm"
R1 R2 R7 R8 R12 R14 R18 R20 R24 R25 R28 R29 R36 R37: library part CRCW06031K00FKEAC, "Thick Film Resistors - SMD 1/10Watt 1Kohms 1% Commercial Use", Case Code - in=0603, Case Code - mm=1608, Manufacturer=Vishay, Maximum Operating Temperature="+ 155 C", Minimum Operating Temperature="- 55 C", Package / Case="0603 (1608 metric)", Power Rating="100 mW (1/10 W)", Resistance="1 kOhms", Supplier Part Number 1=71-CRCW06031K00FKEAC, Temperature Coefficient="100 PPM / C", Tolerance="1 %", Voltage Rating="75 V", Brand=Vishay, Category="Thick Film Resistors - SMD", ComponentLink1Description=https://www.mouser.com/datasheet/2/427/crcwce3-1223726.pdf, ComponentLink1URL=https://www.mouser.com/datasheet/2/427/crcwce3-1223726.pdf, Features=-, Height="0.45 mm", Length="1.55 mm", Manufacturer Part Number=CRCW06031K00FKEAC, Minimum Order Quantity=1, Mounting Style="PCB Mount", Packaging="Cut Tape", Pricing 1="1=0.087, 10=0.024, 100=0.010, 500=0.006, 1000=0.003, 5000=0.003 (EUR)", Product="Thick Film Resistors SMD", Product Status="New Product", Product Type="Thick Film Resistors", Reeling=True, RoHS="RoHS Compliant By Exemption", RoHS - Mouser=E, Series="CRCW-C e3", Standard Pack Qty=5000, Stock 1=673640, Subcategory=Resistors, Supplier 1=Mouser, Technology="Thick Film", Termination Style=SMD/SMT, Width="0.85 mm"
R3 R9 R15 R21 R27 R30: library part SFR03EZPF1002, "Thick Film Resistors - SMD 0603 10Kohms 1% Anti-Sulfur AEC-Q200", Case Code - in=0603, Case Code - mm=1608, Manufacturer="ROHM Semiconductor", Maximum Operating Temperature="+ 155 C", Minimum Operating Temperature="- 55 C", Package / Case="0603 (1608 metric)", Power Rating="100 mW (1/10 W)", Resistance="10 kOhms", Supplier Part Number 1=755-SFR03EZPF1002, Temperature Coefficient="100 PPM / C", Tolerance="1 %", Voltage Rating="50 V", Application="Automotive Grade", Brand="ROHM Semiconductor", Category="Thick Film Resistors - SMD", ComponentLink1Description=https://www.mouser.com/datasheet/2/348/sfr-e-1507454.pdf, ComponentLink1URL=https://www.mouser.com/datasheet/2/348/sfr-e-1507454.pdf, Features="Anti-Sulfur Resistors", Height="0.45 mm", Length="1.6 mm", Manufacturer Part Number=SFR03EZPF1002, Minimum Order Quantity=1, Mounting Style="PCB Mount", Packaging="Cut Tape", Pricing 1="1=0.087, 10=0.069, 100=0.024, 1000=0.017, 5000=0.013, 10000=0.011, 25000=0.010, 50000=0.009, 100000=0.008 (EUR)", Product="Thick Film Resistors SMD", Product Status="New Product", Product Type="Thick Film Resistors", Reeling=True, RoHS="RoHS Compliant", RoHS - Mouser=Y, Series=SFR, Standard Pack Qty=5000, Stock 1=16683, Subcategory=Resistors, Supplier 1=Mouser, Technology="Thick Film", Termination Style=SMD/SMT, Width="0.8 mm"
R4: library part AC0603FR-13470RL, "Thick Film Resistors - SMD 470 ohm 1% 1/10W AEC-Q200", Case Code - in=0603, Case Code - mm=1608, Manufacturer=Yageo, Maximum Operating Temperature="+ 155 C", Minimum Operating Temperature="- 55 C", Package / Case="0603 (1608 metric)", Power Rating="100 mW (1/10 W)", Supplier Part Number 1=603-AC0603FR-13470RL, Temperature Coefficient="100 PPM / C", Tolerance="1 %", Brand=Yageo, Category="Thick Film Resistors - SMD", ComponentLink1Description=https://www.mouser.com/datasheet/2/447/PYu-AC_51_RoHS_L_6-1152827.pdf, ComponentLink1URL=https://www.mouser.com/datasheet/2/447/PYu-AC_51_RoHS_L_6-1152827.pdf, Features=-, Height="0.45 mm", Length="1.6 mm", Manufacturer Part Number=AC0603FR-13470RL, Minimum Order Quantity=1, Mounting Style="PCB Mount", Packaging="Cut Tape", Pricing 1="1=0.087, 10=0.019, 100=0.007, 1000=0.005, 2500=0.003, 20000=0.003 (EUR)", Product="Thick Film Resistors General Purpose", Product Status="New Product", Product Type="Thick Film Resistors", Reeling=True, Resistance="470 Ohms", RoHS="RoHS Compliant", RoHS - Mouser=Y, Series=AC, Standard Pack Qty=20000, Stock 1=35113, Subcategory=Resistors, Supplier 1=Mouser, Technology="Thick Film", Termination Style=SMD/SMT, Width="0.8 mm"
R5 R6: library part RC0603FR-0710KL, "Thick Film Resistors - SMD 10K OHM 1%", Case Code - in=0603, Case Code - mm=1608, Manufacturer=Yageo, Maximum Operating Temperature="+ 155 C", Minimum Operating Temperature="- 55 C", Package / Case="0603 (1608 metric)", Power Rating="100 mW, 200 mW", Resistance="10 kOhms", Supplier Part Number 1=603-RC0603FR-0710KL, Temperature Coefficient="100 PPM / C", Tolerance="1 %", Voltage Rating="75 V", Application="High Reliability", Brand=Yageo, Category="Thick Film Resistors - SMD", ComponentLink1Description=https://www.mouser.com/datasheet/2/447/PYu-RC_Group_51_RoHS_L_9-1314892.pdf, ComponentLink1URL=https://www.mouser.com/datasheet/2/447/PYu-RC_Group_51_RoHS_L_9-1314892.pdf, Features=-, Height="0.45 mm", Length="1.6 mm", Manufacturer Part Number=RC0603FR-0710KL, Minimum Order Quantity=1, Mounting Style="PCB Mount", Packaging="Cut Tape", Pricing 1="1=0.087, 10=0.016, 100=0.005, 1000=0.004, 5000=0.003, 50000=0.002 (EUR)", Product="Thick Film Resistors SMD", Product Type="Thick Film Resistors", Reeling=True, RoHS="RoHS Compliant", RoHS - Mouser=Y, Series=RC, Standard Pack Qty=5000, Stock 1=22043469, Subcategory=Resistors, Supplier 1=Mouser, Technology="Thick Film", Termination Style=SMD/SMT, Type="General Purpose", Width="0.8 mm"
R10 R16 R22: library part RC0603FR-077K5L, "Thick Film Resistors - SMD 7.5K OHM 1%", Case Code - in=0603, Case Code - mm=1608, Manufacturer=Yageo, Maximum Operating Temperature="+ 155 C", Minimum Operating Temperature="- 55 C", Package / Case="0603 (1608 metric)", Power Rating="100 mW, 200 mW", Resistance="7.5 kOhms", Supplier Part Number 1=603-RC0603FR-077K5L, Temperature Coefficient="100 PPM / C", Tolerance="1 %", Voltage Rating="75 V", Application="High Reliability", Brand=Yageo, Category="Thick Film Resistors - SMD", ComponentLink1Description=https://www.mouser.com/datasheet/2/447/PYu-RC_Group_51_RoHS_L_9-1314892.pdf, ComponentLink1URL=https://www.mouser.com/datasheet/2/447/PYu-RC_Group_51_RoHS_L_9-1314892.pdf, Features=-, Height="0.45 mm", Length="1.6 mm", Manufacturer Part Number=RC0603FR-077K5L, Minimum Order Quantity=1, Mounting Style="PCB Mount", Packaging="Cut Tape", Pricing 1="1=0.087, 10=0.016, 100=0.005, 1000=0.004, 5000=0.003, 50000=0.002 (EUR)", Product="Thick Film Resistors SMD", Product Type="Thick Film Resistors", Reeling=True, RoHS="RoHS Compliant By Exemption", RoHS - Mouser=E, Series=RC, Standard Pack Qty=5000, Stock 1=148379, Subcategory=Resistors, Supplier 1=Mouser, Technology="Thick Film", Termination Style=SMD/SMT, Type="General Purpose", Width="0.8 mm"
R11 R17 R23: library part RC0603FR-07523RL, "Thick Film Resistors - SMD 523 OHM 1%", Case Code - in=0603, Case Code - mm=1608, Manufacturer=Yageo, Maximum Operating Temperature="+ 155 C", Minimum Operating Temperature="- 55 C", Package / Case="0603 (1608 metric)", Power Rating="100 mW, 200 mW", Resistance="523 Ohms", Supplier Part Number 1=603-RC0603FR-07523RL, Temperature Coefficient="100 PPM / C", Tolerance="1 %", Voltage Rating="75 V", Application="High Reliability", Brand=Yageo, Category="Thick Film Resistors - SMD", ComponentLink1Description=https://www.mouser.com/datasheet/2/447/PYu-RC_Group_51_RoHS_L_9-1314892.pdf, ComponentLink1URL=https://www.mouser.com/datasheet/2/447/PYu-RC_Group_51_RoHS_L_9-1314892.pdf, Features=-, Height="0.45 mm", Length="1.6 mm", Manufacturer Part Number=RC0603FR-07523RL, Minimum Order Quantity=1, Mounting Style="PCB Mount", Packaging="Cut Tape", Pricing 1="1=0.087, 10=0.016, 100=0.005, 1000=0.004, 5000=0.003, 50000=0.002 (EUR)", Product="Thick Film Resistors SMD", Product Type="Thick Film Resistors", Reeling=True, RoHS="RoHS Compliant", RoHS - Mouser=Y, Series=RC, Standard Pack Qty=5000, Stock 1=47821, Subcategory=Resistors, Supplier 1=Mouser, Technology="Thick Film", Termination Style=SMD/SMT, Type="General Purpose", Width="0.8 mm"
R13 R19 R26: library part RC0603FR-072K49L, "Thick Film Resistors - SMD 2.49K OHM 1%", Case Code - in=0603, Case Code - mm=1608, Manufacturer=Yageo, Maximum Operating Temperature="+ 155 C", Minimum Operating Temperature="- 55 C", Package / Case="0603 (1608 metric)", Power Rating="100 mW, 200 mW", Resistance="2.49 kOhms", Supplier Part Number 1=603-RC0603FR-072K49L, Temperature Coefficient="100 PPM / C", Tolerance="1 %", Voltage Rating="75 V", Application="High Reliability", Brand=Yageo, Category="Thick Film Resistors - SMD", ComponentLink1Description=https://www.mouser.com/datasheet/2/447/PYu-RC_Group_51_RoHS_L_9-1314892.pdf, ComponentLink1URL=https://www.mouser.com/datasheet/2/447/PYu-RC_Group_51_RoHS_L_9-1314892.pdf, Features=-, Height="0.45 mm", Length="1.6 mm", Manufacturer Part Number=RC0603FR-072K49L, Minimum Order Quantity=1, Mounting Style="PCB Mount", Packaging="Cut Tape", Pricing 1="1=0.087, 10=0.016, 100=0.005, 1000=0.004, 5000=0.003, 50000=0.002 (EUR)", Product="Thick Film Resistors SMD", Product Type="Thick Film Resistors", Reeling=True, RoHS="RoHS Compliant By Exemption", RoHS - Mouser=E, Series=RC, Standard Pack Qty=5000, Stock 1=331833, Subcategory=Resistors, Supplier 1=Mouser, Technology="Thick Film", Termination Style=SMD/SMT, Type="General Purpose", Width="0.8 mm"
R31 R34 R35: library part CRCW06030000Z0EAC, "Thick Film Resistors - SMD 1/10Watt 0ohms Commercial Use", Case Code - in=0603, Case Code - mm=1608, Manufacturer=Vishay, Maximum Operating Temperature="+ 155 C", Minimum Operating Temperature="- 55 C", Package / Case="0603 (1608 metric)", Power Rating="100 mW (1/10 W)", Resistance="0 Ohms", Supplier Part Number 1=71-CRCW06030000Z0EAC, Temperature Coefficient=-, Voltage Rating="75 V", Brand=Vishay, Category="Thick Film Resistors - SMD", ComponentLink1Description=https://www.mouser.com/datasheet/2/427/crcwce3-1223726.pdf, ComponentLink1URL=https://www.mouser.com/datasheet/2/427/crcwce3-1223726.pdf, Features=-, Height="0.45 mm", Length="1.55 mm", Manufacturer Part Number=CRCW06030000Z0EAC, Minimum Order Quantity=1, Mounting Style="PCB Mount", Packaging="Cut Tape", Pricing 1="1=0.087, 10=0.024, 100=0.010, 1000=0.004, 2000=0.003, 5000=0.003 (EUR)", Product="Thick Film Resistors SMD", Product Status="New Product", Product Type="Thick Film Resistors", Reeling=True, RoHS="RoHS Compliant By Exemption", RoHS - Mouser=E, Series="CRCW-C e3", Standard Pack Qty=5000, Stock 1=995828, Subcategory=Resistors, Supplier 1=Mouser, Technology="Thick Film", Termination Style=SMD/SMT, Width="0.85 mm"
R32 R33: library part RC0603FR-071ML, "Thick Film Resistors - SMD 1M OHM 1%", Case Code - in=0603, Case Code - mm=1608, Manufacturer=Yageo, Maximum Operating Temperature="+ 155 C", Minimum Operating Temperature="- 55 C", Package / Case="0603 (1608 metric)", Power Rating="100 mW, 200 mW", Resistance="1 MOhms", Supplier Part Number 1=603-RC0603FR-071ML, Temperature Coefficient="100 PPM / C", Tolerance="1 %", Voltage Rating="75 V", Application="High Reliability", Brand=Yageo, Category="Thick Film Resistors - SMD", ComponentLink1Description=https://www.mouser.com/datasheet/2/447/PYu-RC_Group_51_RoHS_L_9-1314892.pdf, ComponentLink1URL=https://www.mouser.com/datasheet/2/447/PYu-RC_Group_51_RoHS_L_9-1314892.pdf, Features=-, Height="0.45 mm", Length="1.6 mm", Manufacturer Part Number=RC0603FR-071ML, Minimum Order Quantity=1, Mounting Style="PCB Mount", Packaging="Cut Tape", Pricing 1="1=0.087, 10=0.016, 100=0.005, 1000=0.004, 5000=0.003, 50000=0.002 (EUR)", Product="Thick Film Resistors SMD", Product Type="Thick Film Resistors", Reeling=True, RoHS="RoHS Compliant", RoHS - Mouser=Y, Series=RC, Standard Pack Qty=5000, Stock 1=5552342, Subcategory=Resistors, Supplier 1=Mouser, Technology="Thick Film", Termination Style=SMD/SMT, Type="General Purpose", Width="0.8 mm"
U1: library part node_v1
U2 U4 U6: "ESD Suppressors / TVS Diodes IP4220CZ6/SC-74/REEL 13\" Q1/T1", Manufacturer=Nexperia, Supplier Part Number 1=771-IP4220CZ6F, Brand=Nexperia, Category="ESD Suppressors / TVS Diodes", Manufacturer Part Number=IP4220CZ6F, Minimum Order Quantity=1, Packaging="Cut Tape", Pricing 1="1=0.349, 10=0.272, 100=0.147, 1000=0.110, 2500=0.095, 10000=0.089, 20000=0.082, 50000=0.079 (EUR)", Product Type="TVS Diodes", Reeling=True, RoHS="RoHS Compliant", RoHS - Mouser=Y, Standard Pack Qty=10000, Stock 1=23187, Subcategory="TVS Diodes / ESD Suppression Diodes", Supplier 1=Mouser
U3: library part MCP9808T-E/MS, "Board Mount Temperature Sensors Silicon temp sensor with I2C interface", Manufacturer="Microchip Technology", Maximum Operating Temperature="+ 125 C", Minimum Operating Temperature="- 40 C", Operating Supply Current="200 uA", Package / Case=MSOP-8, Supplier Part Number 1=579-MCP9808T-E/MS, Supply Voltage - Max="5.5 V", Supply Voltage - Min="2.7 V", Accuracy="+/- 1 C", Brand="Microchip Technology", Category="Board Mount Temperature Sensors", ComponentLink1Description=https://www.mouser.com/datasheet/2/268/25095A-15487.pdf, ComponentLink1URL=https://www.mouser.com/datasheet/2/268/25095A-15487.pdf, Interface Type="2-Wire, I2C, SMBus", Manufacturer Part Number=MCP9808T-E/MS, Minimum Order Quantity=1, Mounting Style=SMD/SMT, Output Type=Digital, Packaging="Cut Tape", Pricing 1="1=1.01, 10=0.996, 25=0.845, 100=0.764, 2500=0.764 (EUR)", Product=Sensor, Product Type="Temperature Sensors", Reeling=True, Resolution="16 bit", RoHS="RoHS Compliant", RoHS - Mouser=Y, Series=MCP9808T, Shutdown=Shutdown, Standard Pack Qty=2500, Stock 1=2211, Subcategory=Sensors, Supplier 1=Mouser
U5: library part AD7194BCPZ, "Analog to Digital Converters - ADC 8CH Ultra Low Noise 24Bit w/ PGA", Input Voltage="+/- 2.5 V", Manufacturer="Analog Devices", Maximum Operating Temperature="+ 105 C", Minimum Operating Temperature="- 40 C", Operating Supply Voltage="3.3 V, 5 V", Package / Case=LFCSP-32, Pd - Power Dissipation="29 mW", Supplier Part Number 1=584-AD7194BCPZ, Architecture=Sigma-Delta, Brand="Analog Devices", Category="Analog to Digital Converters - ADC", ComponentLink1Description=https://www.mouser.com/datasheet/2/609/AD7194-1501808.pdf, ComponentLink1URL=https://www.mouser.com/datasheet/2/609/AD7194-1501808.pdf, Development Kit=EVAL-AD7194EBZ, Gain Error="+/- 0.005 %FSR", Height="0.73 mm", INL - Integral Nonlinearity="+/- 30 ppm of FSR", Input Type=Differential/Pseudo-Differential, Interface Type="Serial, 3-Wire, SPI", Length="5 mm", Manufacturer Part Number=AD7194BCPZ, Minimum Order Quantity=1, Mounting Style=SMD/SMT, Number of ADC Inputs="16 Input/8 Input", Number of Channels="8 Channel", Number of Converters="1 Converter", Packaging=Tray, Pricing 1="1=13.48, 10=12.23, 25=11.49, 50=11.06, 100=9.96, 250=9.20, 500=8.65, 1000=8.35 (EUR)", Product="Analog to Digital Converters", Product Type="ADCs - Analog to Digital Converters", Reeling=False, Reference Type=External, Resolution="24 bit", RoHS="RoHS Compliant", RoHS - Mouser=Y, Sample and Hold=No, Sampling Rate="4.8 kS/s", Series=AD7194, Standard Pack Qty=490, Stock 1=878, Subcategory="Data Converter ICs", Supplier 1=Mouser, Width="5 mm"
U7: "Operational Amplifiers - Op Amps Single 1.8V 1MHz", en - Input Voltage Noise Density="28 nV/sqrt Hz", Ib - Input Bias Current="1 pA", In - Input Noise Current Density="0.0006 pA/sqrt Hz", Manufacturer="Microchip Technology", Maximum Operating Temperature="+ 85 C", Minimum Operating Temperature="- 40 C", Operating Supply Current="100 uA", Operating Supply Voltage="1.8 V to 5.5 V", Output Current per Channel="23 mA", Package / Case=SOT-23-5, PSRR - Power Supply Rejection Ratio="86 dB", Supplier Part Number 1=579-MCP6001T-I/OT, Supply Voltage - Max="5.5 V", Supply Voltage - Min="1.8 V", Voltage Gain dB="112 dB", Vos - Input Offset Voltage="4.5 mV", Amplifier Type="Low Power Amplifier", Brand="Microchip Technology", Category="Operational Amplifiers - Op Amps", CMRR - Common Mode Rejection Ratio="60 dB", ComponentLink1Description=https://www.mouser.com/datasheet/2/268/21733e-41017.pdf, ComponentLink1URL=https://www.mouser.com/datasheet/2/268/21733e-41017.pdf, GBP - Gain Bandwidth Product="1 MHz", Height="1.3 mm (Max)", Length="3.1 mm (Max)", Manufacturer Part Number=MCP6001T-I/OT, Minimum Order Quantity=1, Mounting Style=SMD/SMT, Number of Channels="1 Channel", Packaging="Cut Tape", Pricing 1="1=0.210, 25=0.180, 100=0.162, 3000=0.162 (EUR)", Product="Operational Amplifiers", Product Type="Op Amps - Operational Amplifiers", Reeling=True, RoHS="RoHS Compliant", RoHS - Mouser=Y, Shutdown="No Shutdown", SR - Slew Rate="0.6 V/us", Standard Pack Qty=3000, Stock 1=73026, Subcategory="Amplifier ICs", Supplier 1=Mouser, Supply Type=Single, Technology=CMOS, Width="1.8 mm (Max)"
VR1: library part TLV75533PDBVR, "LDO Voltage Regulators 500-mA, Low IQ, Small Size, Low Dropout Regulator 5-SOT-23 -40 to 125", Dropout Voltage="220 mV", Dropout Voltage - Max="215 mV", Input Voltage MAX="5.5 V", Input Voltage MIN="1.45 V", Manufacturer="Texas Instruments", Maximum Operating Temperature="+ 125 C", Minimum Operating Temperature="- 40 C", Operating Temperature Range="- 40 C to + 125 C", Output Current="500 mA", Output Voltage="3.3 V", Output Voltage Range=-, Package / Case=SOT-23-5, Quiescent Current="25 uA", Supplier Part Number 1=595-TLV75533PDBVR, Voltage Regulation Accuracy="1.5 %", Brand="Texas Instruments", Category="LDO Voltage Regulators", CNHTS=8542319000, HTS Code=8542390001, Line Regulation="2 mV", Load Regulation="0.06 V/A", Manufacturer Part Number=TLV75533PDBVR, Minimum Order Quantity=1, Mounting Style=SMD/SMT, Number of Outputs="1 Output", Output Type=Fixed, Packaging="Cut Tape", Polarity=Positive, Pricing 1="1=0.541, 10=0.454, 100=0.292, 1000=0.234, 2000=0.212, 3000=0.197, 9000=0.190 (EUR)", Product="LDO Voltage Regulators", Product Status="New Product", Product Type="LDO Voltage Regulators", PSRR / Ripple Rejection - Typ="46 dB", Reeling=True, RoHS="RoHS Compliant", RoHS - Mouser=Y, Series=TLV755P, Standard Pack Qty=3000, Stock 1=48621, Subcategory="PMIC - Power Management ICs", Supplier 1=Mouser, Type="Low Quiescent Current, Ultra Small"
VR2: library part AD1582BRTZ-REEL7, "Voltage References 2.5V MICROPOWER REF IC", Input Voltage="2.7 V to 12 V", Manufacturer="Analog Devices", Maximum Operating Temperature="+ 125 C", Minimum Operating Temperature="- 40 C", Operating Supply Current="70 uA", Output Current="5 mA", Output Voltage="2.5 V", Package / Case=SOT-23-3, Supplier Part Number 1=584-AD1582BRTZ-R7, Temperature Coefficient="50 PPM/C", Accuracy="3.5 mV/mA", Brand="Analog Devices", Category="Voltage References", ComponentLink1Description=https://www.mouser.com/datasheet/2/609/AD1582_1583_1584_1585-876960.pdf, ComponentLink1URL=https://www.mouser.com/datasheet/2/609/AD1582_1583_1584_1585-876960.pdf, Description/Function="2.5 V micropower, precision series mode voltage reference", Height="1.02 mm (Max)", Length="2.9 mm", Load Regulation="3.5 mV/mA", Manufacturer Part Number=AD1582BRTZ-REEL7, Minimum Order Quantity=1, Mounting Style=SMD/SMT, Packaging="Cut Tape", Pricing 1="1=1.97, 10=1.79, 25=1.60, 100=1.46, 250=1.31, 500=1.14, 1000=0.952, 3000=0.919 (EUR)", Product="Voltage References", Product Type="Voltage References", Reeling=True, Reference Type="Series Precision References", RoHS="RoHS Compliant", RoHS - Mouser=Y, Series=AD1582, Shunt Current - Max="5 mA", Standard Pack Qty=3000, Stock 1=7339, Subcategory="PMIC - Power Management ICs", Supplier 1=Mouser, Topology="Series References", Width="1.3 mm"

## Via types
v1: diameter 17.72, hole 7.87, Top Layer to Bottom Layer, 19 vias
v2: diameter 19.68, hole 7.87, Top Layer to Bottom Layer, 9 vias

## Nets (pads, with @x,y where several pads share a name; then routed paths per layer and width w, separated by ;. In a path a pad name is that pad's centre, name@x,y a point inside that pad or via, vN(x,y) a via of type N, cw(c..) or ccw(c..) an arc to the next point about the centre after c; other vN are vias at no path point)
3v3A: C13.2 C14.1 C31.1 L1.2 U5.23 | length 1.4
  Top Layer w12: U5.23@5535.71,3143.7 U5.23
3v3E: C11.2 C12.1 C23.2 C29.1 C30.1 C33.2 C34.2 L1.1 R4.1 R5.2 R6.2 U2.5 U3.8 U4.5 U5.24 U6.5 U7.5 VR1.5 VR2.3 | length 149.2
  Top Layer w10: VR2.3 4757.68,2840.15 C34.2 4777.36,2820.46 C33.2
AGND: C2.2 C3.1 C5.2 C6.1 C7.2 C9.2 C10.1 C11.1 C12.2 C13.1 C14.2 C15.2 C17.2 C18.1 C19.2 C21.2 C22.1 C23.1 C25.2 C26.1 C27.2 C28.2 C29.2 C30.2 C31.2 C32.1 C33.1 C34.1 C36.1 D1.2 D2.1 D3.1 D4.1 D5.1 P5.3 P5.6 P5.9 P9.1 Q1.2 Q2.2 Q3.2 R13.1 R19.1 R26.1 R33.1 R37.2 U1.1 U1.10 U1.14 U1.16 U1.19 U2.2 U3.4 U3.5 U3.6 U3.7 U4.2 U5.5 U5.6 U5.18 U5.21 U5.22 U6.2 U7.2 VR1.2 VR2.2
AN1: C7.1 R10.1 R13.2 U5.2 | length 1040.6
  Top Layer w8: U5.2 5861.22,3144.69 6090.55,2915.35 6090.55,2673.23 6116.14,2647.64 6168.18,2647.64 C7.1 6215.62,2676.94 R13.2 R10.1
AN2: C15.1 R16.1 R19.2 U5.3 | length 761.6
  Top Layer w8: U5.3 5882.87,3164.37 6075.79,2971.46 6160.88,2971.46 C15.1 6207.14,2997.86 R19.2 6295.94,3005.2 R16.1
AN3: C19.1 C27.1 R22.1 R26.2 R31.2 U5.1 U5.4 | length 734.9
  Top Layer w8: U5.4 5959.65,3184.06 6073.82,3298.23 6159.11,3298.23 C19.1 6202.14,3332.98 R26.2 6298.38,3340.2 R22.1
I1: F1.1 P5.8
I2: F2.1 P5.5
I2C_SCL: R6.1 U1.2 U3.1 | length 994.1
  Top Layer w8: v1(5117.13,2892.72) 5118.11,2893.7 U3.1 5292.32,2893.7 R6.1
  Bottom Layer w8: U1.2 5049.21,3642.72 5049.21,2960.63 v1(5117.13,2892.72)
I2C_SDA: R5.1 U1.3 U3.2 | length 902.4
  Top Layer w8: v1(5116.14,2920.28) 5117.13,2919.29 U3.2 5245.08,2919.29 R5.1
  Bottom Layer w8: v1(5116.14,2920.28) 5075.79,2960.63 5075.79,3483.27 5133.86,3541.34 U1.3
I3: F3.1 P5.2
NetD1_1: D1.1 R4.2
NetD2_2: D2.2 F1.2 R10.2 R11.2 | length 540.5
  Top Layer w8: R11.2 6228.41,2549.28 6444.62,2549.28 F1.2 6477.8,2544.29 D2.2 6452.8,2685.2 R10.2
NetD3_2: D3.2 F2.2 R16.2 R17.2 | length 515.7
  Top Layer w8: R17.2 6223.02,2871.64 6439.14,2871.64 F2.2 6467.8,2877.41 D3.2 6438.86,3006.51 R16.2
NetD4_2: D4.2 F3.2 R22.2 R23.2 | length 521.9
  Top Layer w8: R23.2 6222.87,3206.64 6438.36,3206.64 F3.2 6464.8,3210.2 D4.2 6438.49,3341.51 R22.2
NetP2_1: P2.1 R1.2 U2.6
NetP2_2: P2.2 R2.2 R3.1 U2.4 | length 88.1
  Top Layer w8: R2.2 6486.97,3686.02 R3.1
NetP3_1: P3.1 R7.2 U2.1
NetP3_2: P3.2 R8.2 R9.1 U2.3 | length 91.3
  Top Layer w8: R8.2 6186.76,3737.37 R9.1
NetP4_1: P4.1 R12.2 U4.6
NetP4_2: P4.2 R14.2 R15.1 U4.4 | length 91.3
  Top Layer w8: R14.2 5742.39,3728.79 R15.1
NetP6_1: P6.1 R18.2 U4.1
NetP6_2: P6.2 R20.2 R21.1 U4.3 | length 90.8
  Top Layer w8: R20.2 5473.66,3725.84 R21.1
NetP7_1: P7.1 R24.2 U6.6
NetP7_2: P7.2 R25.2 R27.1 U6.4 | length 96.2
  Top Layer w8: R25.2 5038.5,3739.25 R27.1
NetP8_1: P8.1 R28.2 U6.1 | length 6.1
  Top Layer w8: R28.2@4853.42,3736.22 R28.2
NetP8_2: P8.2 R29.2 R30.1 U6.3 | length 93.8
  Top Layer w8: R29.2 4759.76,3686.77 4783.7,3686.77 R30.1
NetQ1_3: Q1.3 R11.1 | length 226.4
  Top Layer w8: R11.1 6172.1,2527.56 6183.91,2539.37 6183.91,2549 6205.78,2570.87 6304.54,2570.87 Q1.3
NetQ2_3: Q2.3 R17.1 | length 228.4
  Top Layer w8: R17.1 6167.32,2849.41 6167.32,2860.17 6191.79,2884.64 6278.52,2884.64 Q2.3
NetQ3_3: Q3.3 R23.1 | length 241.3
  Top Layer w8: R23.1 6169.24,3176.13 6169.24,3197.24 6196.42,3224.41 6278.29,3224.41 Q3.3
NetR31_1: R31.1 U7.1 U7.4
NetR32_2: R32.2 R33.2 U7.3